# EAGLE board 00A-100-A (EAGLE 9.6.2)
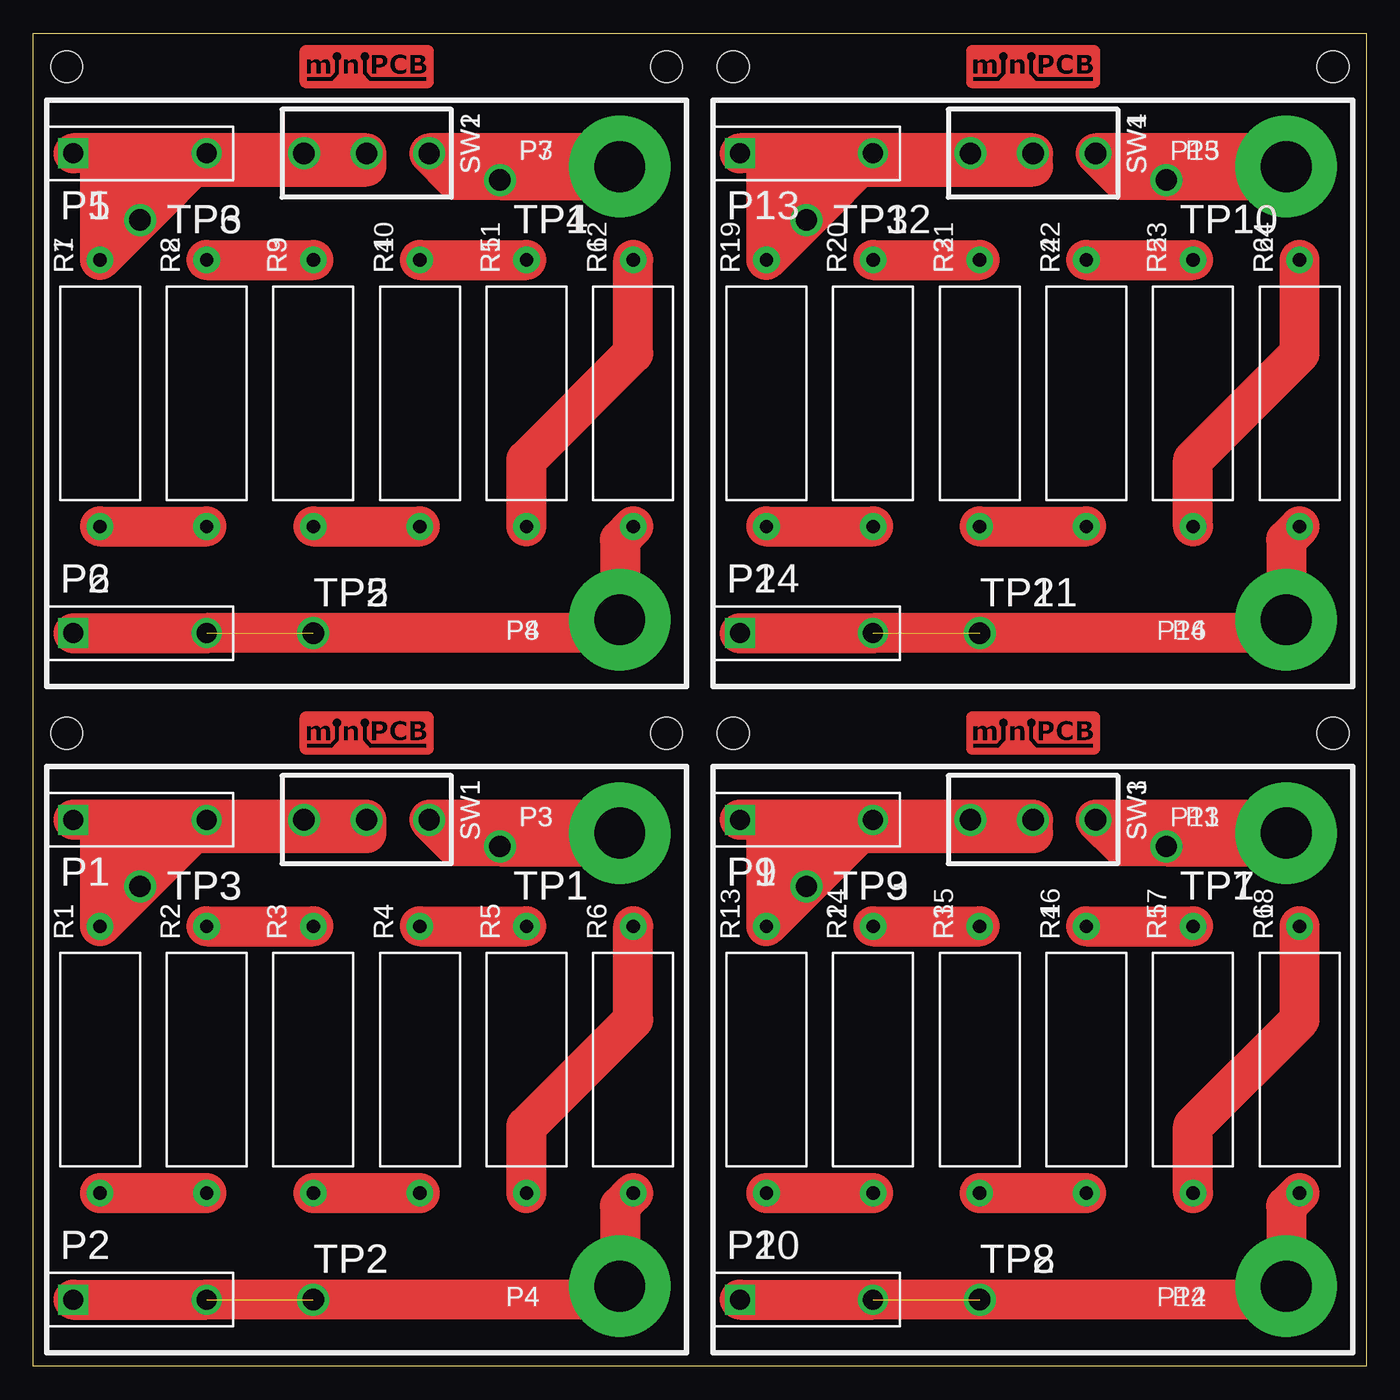
[diagram p0: board, top side]
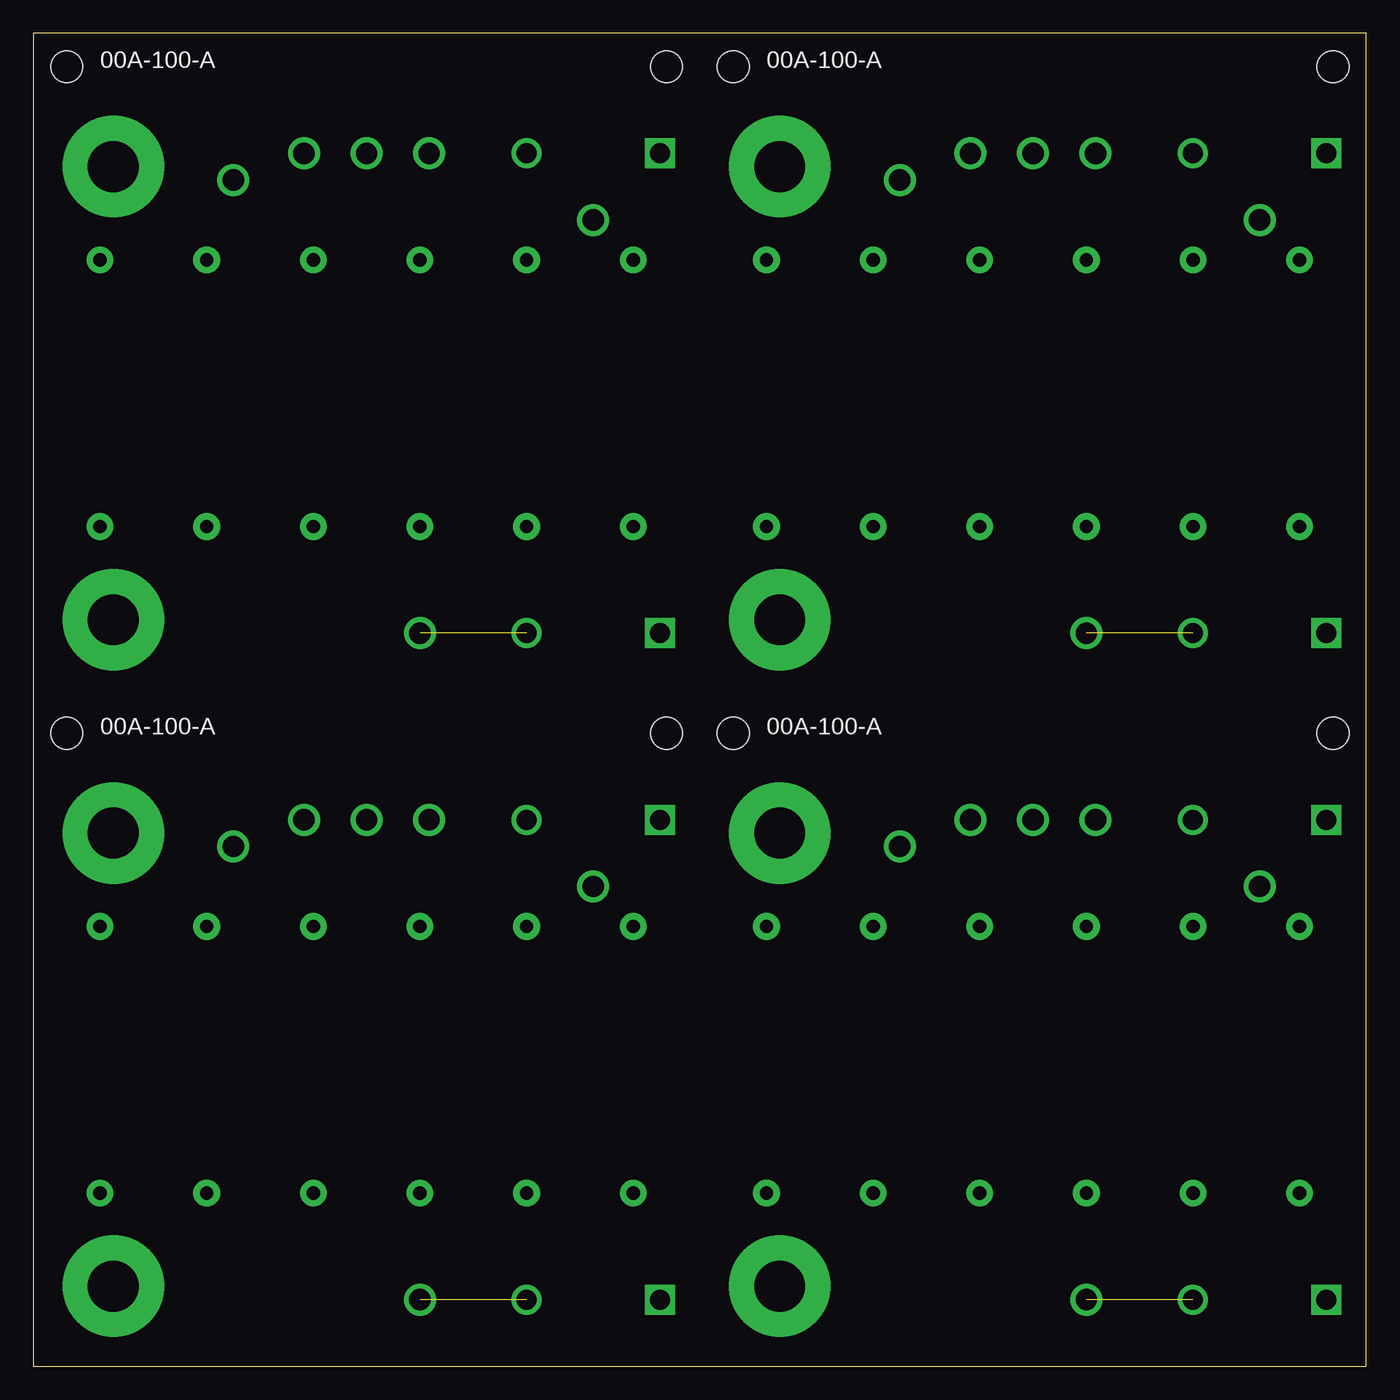
[diagram p1: board, bottom side, seen from below]

Size 100 x 100 mm. Coordinates in mm from the lower left corner, seen from the top.
Outline: 0,0 0,100 100,100 100,0 0,0
Copper layers (1*16): Top 0.035mm / dielectric 0.15mm / Bottom 0.035mm
Design rules "default": minimum track width 6mil, minimum drill 0.35mm, track to track 6mil, track to pad 6mil, pad to pad 6mil, via to via 6mil, smd to smd 6mil, copper to edge 40mil, drill to drill 6mil, minimum pad ring 10mil, minimum via ring 8mil, stop-mask expansion 4mil, vias tented up to drill 0mil, thermal gap 10mil

## Footprints (pad centres in the part's own frame; a part is rotated, then mirrored left to right if it is on the bottom)
PINS_1_KE6060 = drill 1.5 square: 1 -5,0 | drill 1.5: 2 5,0
BANANAPOST = drill 3.81 pad 7.62: 1 0,0
MINIPCB_0P_50X50MM = hole 2.4: 47.5,47.5; 2.5,47.5
R-THD-15MM = drill 1 pad 2: 1 -10,0; 2 10,0
CK1101 = drill 1.6: P$1 0,4.699; P$2 0,0; P$3 0,-4.699
PINS_1_TESTPOINT_KE5100 = drill 1.6: 1 0,0

## Placement (x,y rotation side)
E$1  [MINIPCB_PANEL_IMAGEFRAME]  -25,-35 0 top  (outside the outline)
P1  [PINS_1_KE6060]  8,41 0 top
P2  [PINS_1_KE6060]  8,5 0 top
P3  [BANANAPOST]  44,40 0 top
P4  [BANANAPOST]  44,6 0 top
P5  [PINS_1_KE6060]  8,91 0 top
P6  [PINS_1_KE6060]  8,55 0 top
P7  [BANANAPOST]  44,90 0 top
P8  [BANANAPOST]  44,56 0 top
P9  [PINS_1_KE6060]  58,41 0 top
P10  [PINS_1_KE6060]  58,5 0 top
P11  [BANANAPOST]  94,40 0 top
P12  [BANANAPOST]  94,6 0 top
P13  [PINS_1_KE6060]  58,91 0 top
P14  [PINS_1_KE6060]  58,55 0 top
P15  [BANANAPOST]  94,90 0 top
P16  [BANANAPOST]  94,56 0 top
PCB1  [MINIPCB_0P_50X50MM]  0,0 0 top
PCB2  [MINIPCB_0P_50X50MM]  0,50 0 top
PCB3  [MINIPCB_0P_50X50MM]  50,0 0 top
PCB4  [MINIPCB_0P_50X50MM]  50,50 0 top
R1  [R-THD-15MM]  5,23 270 top
R2  [R-THD-15MM]  13,23 90 top
R3  [R-THD-15MM]  21,23 270 top
R4  [R-THD-15MM]  29,23 270 top
R5  [R-THD-15MM]  37,23 90 top
R6  [R-THD-15MM]  45,23 90 top
R7  [R-THD-15MM]  5,73 270 top
R8  [R-THD-15MM]  13,73 90 top
R9  [R-THD-15MM]  21,73 270 top
R10  [R-THD-15MM]  29,73 270 top
R11  [R-THD-15MM]  37,73 90 top
R12  [R-THD-15MM]  45,73 90 top
R13  [R-THD-15MM]  55,23 270 top
R14  [R-THD-15MM]  63,23 90 top
R15  [R-THD-15MM]  71,23 270 top
R16  [R-THD-15MM]  79,23 270 top
R17  [R-THD-15MM]  87,23 90 top
R18  [R-THD-15MM]  95,23 90 top
R19  [R-THD-15MM]  55,73 270 top
R20  [R-THD-15MM]  63,73 90 top
R21  [R-THD-15MM]  71,73 270 top
R22  [R-THD-15MM]  79,73 270 top
R23  [R-THD-15MM]  87,73 90 top
R24  [R-THD-15MM]  95,73 90 top
SW1  CK1101  [CK1101]  25,41 270 top
SW2  CK1101  [CK1101]  25,91 270 top
SW3  CK1101  [CK1101]  75,41 270 top
SW4  CK1101  [CK1101]  75,91 270 top
TP1  [PINS_1_TESTPOINT_KE5100]  35,39 0 top
TP2  [PINS_1_TESTPOINT_KE5100]  21,5 0 top
TP3  [PINS_1_TESTPOINT_KE5100]  8,36 0 top
TP4  [PINS_1_TESTPOINT_KE5100]  35,89 0 top
TP5  [PINS_1_TESTPOINT_KE5100]  21,55 0 top
TP6  [PINS_1_TESTPOINT_KE5100]  8,86 0 top
TP7  [PINS_1_TESTPOINT_KE5100]  85,39 0 top
TP8  [PINS_1_TESTPOINT_KE5100]  71,5 0 top
TP9  [PINS_1_TESTPOINT_KE5100]  58,36 0 top
TP10  [PINS_1_TESTPOINT_KE5100]  85,89 0 top
TP11  [PINS_1_TESTPOINT_KE5100]  71,55 0 top
TP12  [PINS_1_TESTPOINT_KE5100]  58,86 0 top

## Library data of the parts
E$1 P1-P16 R1-R24 SW1-SW4 TP1-TP12 = minipcb
PCB1-PCB4 = minipcb; PART_NUMBER: 00A-100-A; REVISION: A

## Nets
N$1: P1.1 P1.2 R1.1 SW1.P$2 SW1.P$3 TP3.1
N$2: P2.1 P2.2 P4.1 R6.1 TP2.1
N$3: R1.2 R2.1
N$4: R2.2 R3.1
N$5: P3.1 SW1.P$1 TP1.1
N$6: R3.2 R4.2
N$7: R4.1 R5.2
N$8: R5.1 R6.2
N$9: P5.1 P5.2 R7.1 SW2.P$2 SW2.P$3 TP6.1
N$10: P6.1 P6.2 P8.1 R12.1 TP5.1
N$11: R7.2 R8.1
N$12: R8.2 R9.1
N$13: P7.1 SW2.P$1 TP4.1
N$14: R9.2 R10.2
N$15: R10.1 R11.2
N$16: R11.1 R12.2
N$17: P9.1 P9.2 R13.1 SW3.P$2 SW3.P$3 TP9.1
N$18: P10.1 P10.2 P12.1 R18.1 TP8.1
N$19: R13.2 R14.1
N$20: R14.2 R15.1
N$21: P11.1 SW3.P$1 TP7.1
N$22: R15.2 R16.2
N$23: R16.1 R17.2
N$24: R17.1 R18.2
N$25: P13.1 P13.2 R19.1 SW4.P$2 SW4.P$3 TP12.1
N$26: P14.1 P14.2 P16.1 R24.1 TP11.1
N$27: R19.2 R20.1
N$28: R20.2 R21.1
N$29: P15.1 SW4.P$1 TP10.1
N$30: R21.2 R22.2
N$31: R22.1 R23.2
N$32: R23.1 R24.2

## Tracks (layer width: path | path; a pad name or v marks a point on that pad's centre or on a via)
N$1
  Top 3: P1.2 SW1.P$3 SW1.P$2 25,40 5,40 R1.1 TP3.1 | P1.2 P1.1 | TP3.1 8,39 | TP3.1 P1.2
N$2  (1 unrouted)
  Top 3: P2.1 P2.2 43,5 P4.1 44,12 R6.1
N$3
  Top 3: R1.2 R2.1
N$4
  Top 3: R2.2 R3.1
N$5
  Top 3: P3.1 43,40 42,41 SW1.P$1 31.7,39 TP1.1 43,39 P3.1
N$6
  Top 3: R3.2 R4.2
N$7
  Top 3: R4.1 R5.2
N$8
  Top 3: R5.1 37,18 45,26 R6.2
N$9
  Top 3: P5.2 SW2.P$3 SW2.P$2 25,90 5,90 R7.1 TP6.1 | P5.2 P5.1 | TP6.1 8,89 | TP6.1 P5.2
N$10  (1 unrouted)
  Top 3: P6.1 P6.2 43,55 P8.1 44,62 R12.1
N$11
  Top 3: R7.2 R8.1
N$12
  Top 3: R8.2 R9.1
N$13
  Top 3: P7.1 43,90 42,91 SW2.P$1 31.7,89 TP4.1 43,89 P7.1
N$14
  Top 3: R9.2 R10.2
N$15
  Top 3: R10.1 R11.2
N$16
  Top 3: R11.1 37,68 45,76 R12.2
N$17
  Top 3: P9.2 SW3.P$3 SW3.P$2 75,40 55,40 R13.1 TP9.1 | P9.2 P9.1 | TP9.1 58,39 | TP9.1 P9.2
N$18  (1 unrouted)
  Top 3: P10.1 P10.2 93,5 P12.1 94,12 R18.1
N$19
  Top 3: R13.2 R14.1
N$20
  Top 3: R14.2 R15.1
N$21
  Top 3: P11.1 93,40 92,41 SW3.P$1 81.7,39 TP7.1 93,39 P11.1
N$22
  Top 3: R15.2 R16.2
N$23
  Top 3: R16.1 R17.2
N$24
  Top 3: R17.1 87,18 95,26 R18.2
N$25
  Top 3: P13.2 SW4.P$3 SW4.P$2 75,90 55,90 R19.1 TP12.1 | P13.2 P13.1 | TP12.1 58,89 | TP12.1 P13.2
N$26  (1 unrouted)
  Top 3: P14.1 P14.2 93,55 P16.1 94,62 R24.1
N$27
  Top 3: R19.2 R20.1
N$28
  Top 3: R20.2 R21.1
N$29
  Top 3: P15.1 93,90 92,91 SW4.P$1 81.7,89 TP10.1 93,89 P15.1
N$30
  Top 3: R21.2 R22.2
N$31
  Top 3: R22.1 R23.2
N$32
  Top 3: R23.1 87,68 95,76 R24.2

## Text on the board
_tNames: SW1 | SW1 | P3 | P3 | P1 | P1 | TP3 | TP1 | TP3 | TP1 | R1 | R2 | R3 | R4 | R5 | R6 | R1 | R2 | R3 | R4 | R5 | R6 | P2 | P2 | TP2 | TP2 | P4 | P4 | SW1 | SW1 | P3 | P3 | P1 | P1 | TP3 | TP1 | TP3 | TP1 | R1 | R2 | R3 | R4 | R5 | R6 | R1 | R2 | R3 | R4 | R5 | R6 | P2 | P2 | TP2 | TP2 | P4 | P4